# Altium PCB isokey_left.PcbDoc (part 3 of 5)
Units mm, origin at the board's own origin, x right, y up, seen from the top; angles counter-clockwise.
Board outline 154.06 x 134.15 mm, 2 copper layers (Top Layer, Bottom Layer), stack 1.569 mm thick; 140 components, 88 nets, 412 pads, 257 vias.
Unrouted connection lines stored in the file: 18.
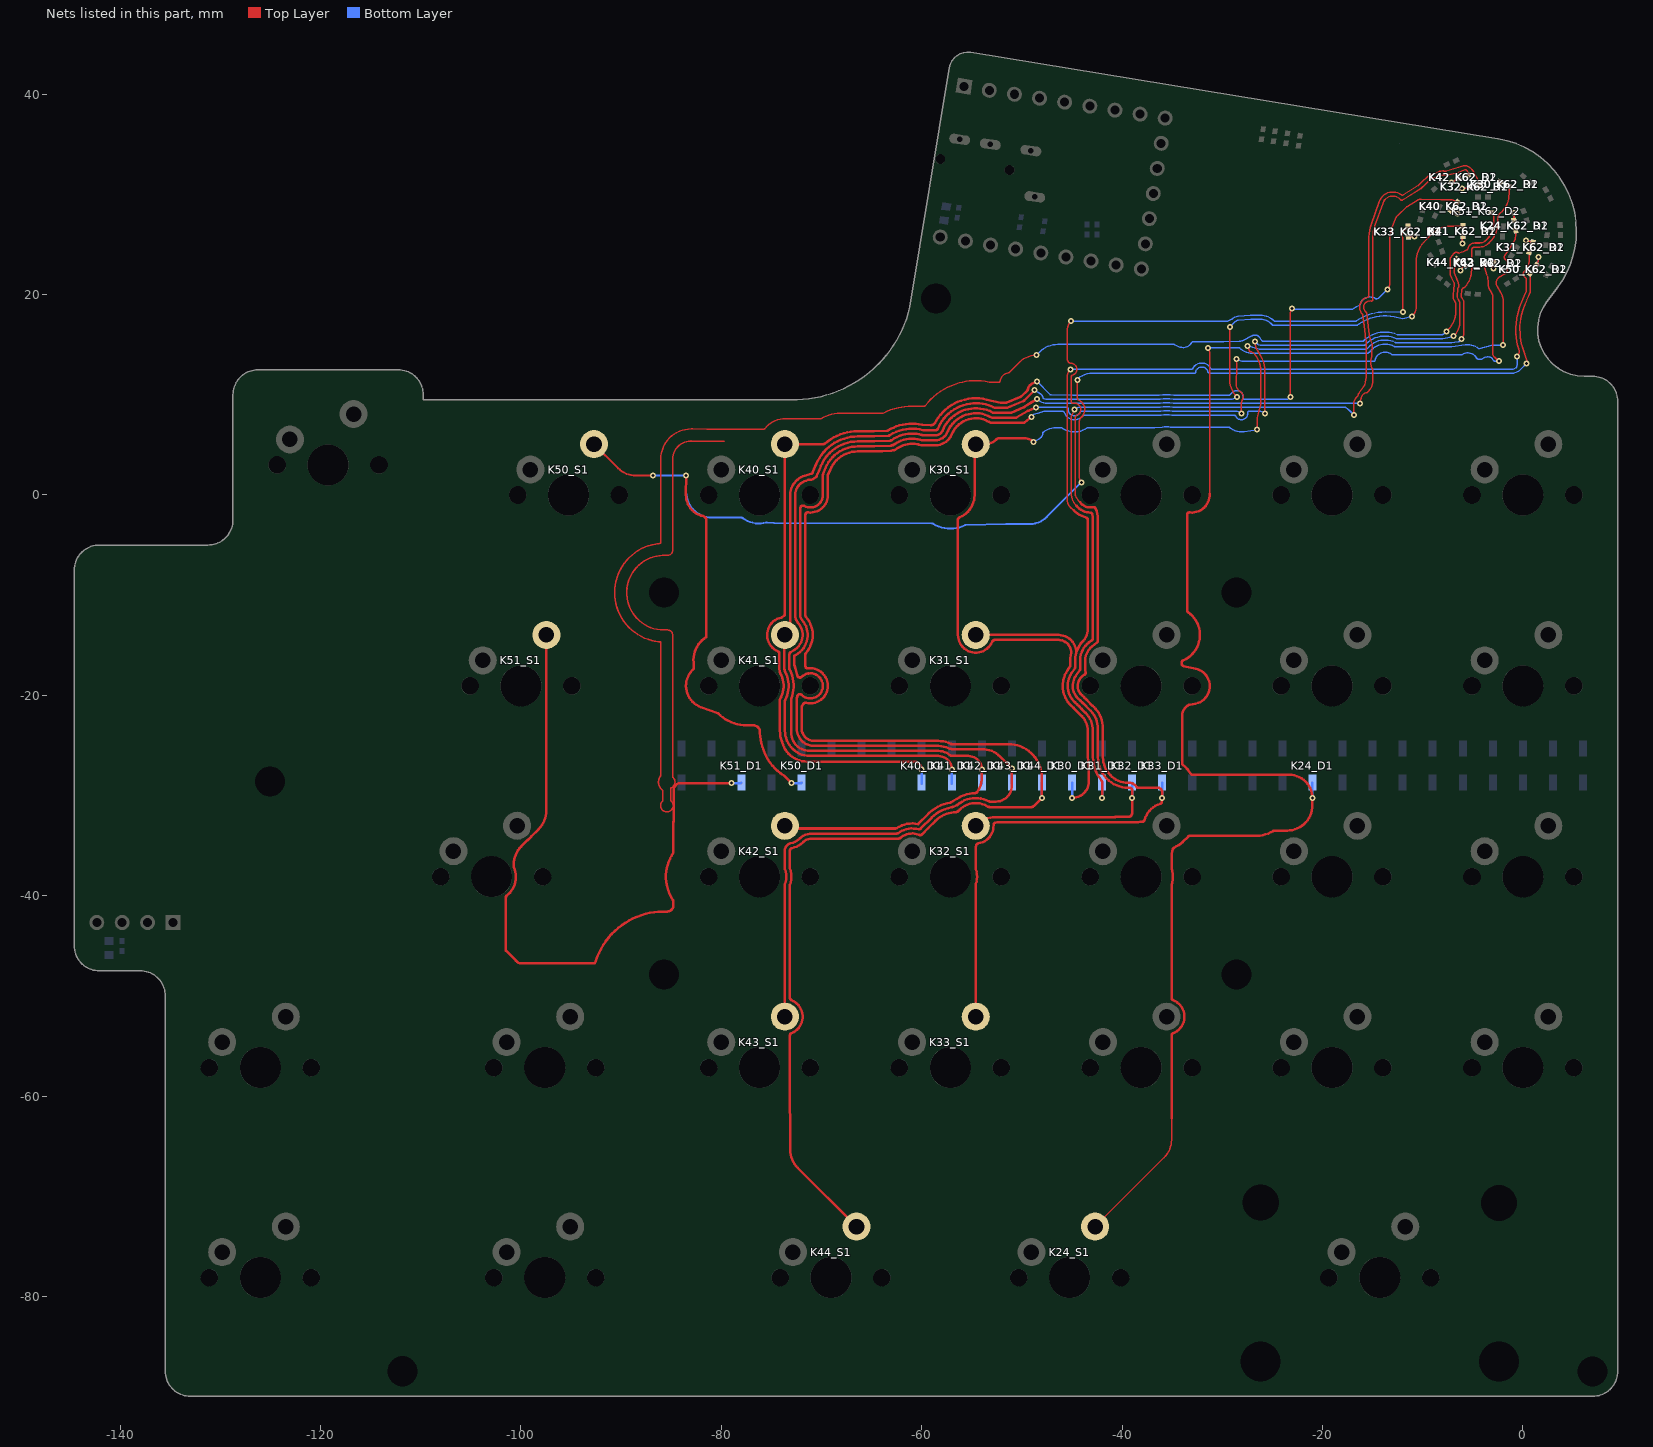
[diagram p3: the nets of this part, all layers, seen from the top]

## Via types
v1: diameter 0.6, hole 0.3, Top Layer to Bottom Layer, 257 vias

## Nets (pads, with @x,y where several pads share a name; then routed paths per layer and width w, separated by ;. In a path a pad name is that pad's centre, name@x,y a point inside that pad or via, vN(x,y) a via of type N, cw(c..) or ccw(c..) an arc to the next point about the centre after c; other vN are vias at no path point) (continued)
NetK24_D1_2: K24_D1.2 K24_K62_D2.2 K24_S1.2 | length 169.7
  Top Layer w0.15: K24_S1.2@-42.698,-73.026 -35.81,-66.138 ccw(c-37.606,-64.342) -35.066,-64.342 -35.066,-57.441 ; v1(-31.435,14.676) cw(c-31.823,14.288) -31.275,14.288 -31.275,0.128 ; -2.57,20.801 cw(c-2.916,20.6) -2.569,20.798 -2.222,20.198 -2.054,19.908 cw(c-2.184,19.833) -2.039,19.871 cw(c-4.001,19.366) -1.975,19.366 v1(-1.975,14.948) ; -2.57,20.801 cw(c-1.942,21.162) -2.667,21.156 cw(c-1.942,21.162) -2.625,21.404 cw(c-1.942,21.162) -2.306,21.789 -1.65,22.171 ccw(c-1.726,22.301) -1.648,22.173 ; -1.647,22.173 -1.592,22.207 ccw(c-1.633,22.247) -1.576,22.247 -1.576,23.296 ccw(c-1.726,23.296) -1.643,23.421 -1.713,23.467 cw(c-1.535,23.739) -1.806,23.918 -1.475,24.418 cw(c-1.204,24.239) -1.473,24.422 ; -1.472,24.423 -0.924,25.253 -0.797,25.444 ccw(c-0.923,25.527) -0.777,25.492 ccw(c-3.251,26.064) -0.711,26.064 K24_K62_D2.2@-0.711,26.397
  Top Layer w0.25: -35.066,-62.227 -35.066,-57.441 -35.066,-53.952 cw(c-34.816,-53.953) -34.909,-53.721 ccw(c-35.56,-52.07) -34.904,-50.421 cw(c-34.81,-50.189) -35.06,-50.19 -35.06,-43 -35.06,-38.995 cw(c-34.81,-38.996) -35.05,-38.926 ccw(c-37.856,-38.1) -35.05,-37.274 cw(c-34.81,-37.204) -35.06,-37.205 -35.06,-36.04 cw(c-33.02,-36.04) -34.929,-35.32 cw(c-34.695,-35.41) -34.806,-35.186 -34.602,-35.084 ccw(c-34.822,-34.635) -34.599,-35.082 ccw(c-35.56,-33.02) -33.97,-34.647 -33.392,-34.082 cw(c-33.217,-34.261) -33.256,-34.014 -33.25,-34.013 ccw(c-33.301,-33.516) -33.247,-34.013 ccw(c-33.301,-33.516) -33.245,-34.012 cw(c-33.02,-36.04) -33.02,-34 -26.54,-34 ccw(c-26.54,-30.96) -24.928,-33.537 cw(c-24.796,-33.75) -24.798,-33.5 -23.54,-33.5 ccw(c-23.54,-30.96) -21,-30.96 v1(-21,-30.25) ccw(c-23.326,-30.25) -23.326,-27.924 -32.956,-27.924 cw(c-32.956,-27.674) -33.169,-27.804 ccw(c-35.978,-29.506) -33.908,-26.956 cw(c-33.75,-26.763) -34,-26.763 -34,-21.986 -34,-21.985 cw(c-32.884,-21.985) -33.327,-20.96 cw(c-33.228,-21.19) -33.245,-20.941 ccw(c-33.419,-18.124) -32.41,-20.759 ccw(c-33.051,-19.086) -31.395,-18.4 -31.398,-18.393 ccw(c-33.02,-19.05) -32.646,-17.34 ; -33.91,-16.516 ccw(c-33.81,-16.745) -34.06,-16.745 -34.06,-16.831 ccw(c-33.81,-16.83) -33.863,-17.074 -32.647,-17.34 ; -33.91,-16.516 ccw(c-35.014,-13.97) -33.41,-11.706 cw(c-33.264,-11.503) -33.514,-11.504 -33.514,-1.984 cw(c-33.264,-1.985) -33.234,-1.737 ccw(c-33.02,0) -31.275,0.128
  Bottom Layer w0.15: v1(-31.435,14.676) -28.28,14.676 ccw(c-26.992,15.964) -26.992,14.142 -15.534,14.142 ccw(c-15.535,14.292) -15.453,14.167 ccw(c-16.859,16.282) -15.227,14.336 ccw(c-15.324,14.45) -15.206,14.358 cw(c-13.76,13.244) -14.817,14.732 cw(c-13.76,13.244) -12.849,14.825 ccw(c-12.774,14.956) -12.775,14.806 -7.12,14.806 ccw(c-7.12,14.956) -7.101,14.807 -5.738,14.977 cw(c-5.506,13.167) -4.387,14.609 -3.091,14.944 cw(c-3.053,14.798) -3.053,14.948 v1(-1.975,14.948)
  Bottom Layer w0.25: v1(-21,-30.25) K24_D1.2@-21,-28.7
NetK24_K62_D2_1: K24_K62_D2.1 K24_K62_R1.2 | length 1.5
  Top Layer w0.2: K24_K62_D2.1@-0.885,27.382 -0.889,27.387 -0.889,28.147 v1(-0.885,28.151)
  Bottom Layer w0.2: K24_K62_R1.2@-0.885,27.382 -0.889,27.387 -0.889,28.147 v1(-0.885,28.151)
NetK30_D1_2: K30_D1.2 K30_K62_D2.2 K30_S1.2 | length 129
  Top Layer w0.15: v1(-27.494,14.878) -27.325,14.41 ccw(c-27.184,14.461) -27.222,14.316 -27.125,14.291 cw(c-27.163,14.146) -27.099,14.281 ; -27.098,14.281 -26.933,14.201 cw(c-26.998,14.066) -26.895,14.174 -26.893,14.173 cw(c-28.69,12.378) -26.15,12.378 -26.15,9.037 cw(c-26.3,9.038) -26.156,8.997 -26.352,8.299 ccw(c-25.75,8.13) -26.352,8.297 -26.512,7.72 ccw(c-26.368,7.68) -26.518,7.68 v1(-26.518,6.526) ; v1(-6.131,15.558) ccw(c-6.674,16.101) -5.906,16.101 -5.906,19.327 ccw(c-6.056,19.327) -5.925,19.401 -6.112,19.73 cw(c-5.829,19.89) -6.152,19.921 -6.104,20.419 cw(c-5.78,20.388) -6.001,20.627 cw(c-5.78,20.388) -5.854,20.704 ccw(c-5.89,20.85) -5.779,20.749 ccw(c-7.664,22.451) -5.129,22.293 -5.121,22.422 cw(c-4.821,22.404) -5.118,22.45 -5.052,22.867 ccw(c-5.373,22.917) -5.049,22.942 -5.123,23.901 cw(c-4.799,23.926) -5.124,23.923 -5.124,24.426 cw(c-4.799,24.426) -4.799,24.751 -4.327,24.751 ccw(c-4.327,26.041) -3.414,25.128 -3.275,25.268 ccw(c-5.071,27.064) -2.54,26.849 -2.533,26.969 ccw(c-5.071,27.064) -2.531,27.064 -2.531,27.107 ; -2.531,27.11 -2.503,27.681 cw(c-1.879,27.65) -2.432,27.941 cw(c-1.879,27.65) -2.256,28.149 -2.135,28.24 ccw(c-2.226,28.359) -2.119,28.254 ccw(c-3.915,30.05) -1.375,30.05 K30_K62_D2.2@-1.375,30.817
  Top Layer w0.25: v1(-48.848,5.293) ccw(c-49.78,4.361) -49.78,5.679 -52.185,5.679 ccw(c-52.185,5.095) -52.598,5.508 cw(c-53.631,6.541) -53.631,5.08 K30_S1.2@-54.61,5.08 ccw(c-54.61,4.965) -54.725,4.965 -54.725,0 cw(c-57.15,0) -56.231,-2.244 ccw(c-56.135,-2.475) -56.385,-2.474 -56.385,-13.97 ccw(c-54.61,-13.97) -52.961,-14.627 cw(c-52.729,-14.72) -52.729,-14.47 -46.341,-14.47 cw(c-46.341,-15.736) -45.652,-14.674 cw(c-46.341,-15.736) -45.079,-15.63 cw(c-45.328,-15.65) -45.086,-15.71 ccw(c-41.91,-16.51) -45.183,-16.612 -45.171,-16.995 ; -45.171,-16.995 -45.169,-17.075 -45.32,-17.301 -45.47,-17.527 ccw(c-43.18,-19.05) -45.791,-18.186 ccw(c-43.18,-19.05) -45.865,-18.454 ccw(c-43.18,-19.05) -45.918,-18.791 ccw(c-43.18,-19.05) -45.809,-19.857 ccw(c-43.18,-19.05) -45.656,-20.246 ccw(c-43.18,-19.05) -45.247,-20.863 ccw(c-43.18,-19.05) -45.213,-20.902 ccw(c-43.18,-19.05) -45.042,-21.074 -45.023,-21.091 -44.868,-21.234 cw(c-45.376,-21.786) -44.847,-21.254 ; v1(-45,-30.25) ccw(c-45,-28.565) -43.315,-28.565 -43.315,-27.081 ccw(c-43.565,-27.081) -43.321,-27.028 cw(c-39.37,-26.182) -43.41,-26.182 -43.41,-23.536 ccw(c-45.45,-23.536) -43.996,-22.105 ccw(c-44.174,-22.281) -43.998,-22.103 -44.737,-21.364 -44.846,-21.255 ; -44.846,-21.255 ccw(c-45.2,-21.608) -44.847,-21.254
  Bottom Layer w0.15: v1(-48.848,5.293) -48.25,5.625 ccw(c-48.553,6.172) -47.929,6.149 cw(c-47.779,6.142) -47.871,6.26 cw(c-46.566,4.567) -46.566,6.705 -46.029,6.705 ccw(c-44.75,8.53) -43.507,6.68 cw(c-43.424,6.555) -43.425,6.705 -36.876,6.705 ccw(c-36.876,9.245) -36.731,6.709 -35.988,6.751 cw(c-35.56,5.08) -35.56,6.805 cw(c-35.56,5.08) -35.188,6.764 ; -35.186,6.764 ccw(c-35.1,7.157) -35.183,6.763 ccw(c-35.067,7.307) -35.067,6.751 -29.35,6.751 cw(c-29.351,6.601) -29.256,6.717 ccw(c-28.094,8.13) -27.911,6.31 ccw(c-28.094,8.13) -27.81,6.323 v1(-26.518,6.526) ; v1(-27.494,14.878) -26.321,14.556 ccw(c-26.215,14.942) -26.215,14.542 -15.665,14.542 ccw(c-15.665,14.692) -15.574,14.573 -15.559,14.586 -15.423,14.722 cw(c-13.76,13.244) -12.741,15.222 ccw(c-12.673,15.356) -12.674,15.206 -7.145,15.206 ccw(c-7.145,15.356) -7.126,15.207 -6.441,15.293 ccw(c-6.46,15.441) -6.354,15.335 v1(-6.131,15.558)
  Bottom Layer w0.25: v1(-45,-30.25) K30_D1.2@-45,-28.7
NetK30_K62_D2_1: K30_K62_D2.1 K30_K62_R1.2 | length 1.3
  Top Layer w0.15: v1(-2.597,30.71) cw(c-2.468,30.634) -2.574,30.74 -2.427,30.887 ccw(c-2.793,31.253) K30_K62_D2.1@-2.275,31.253
  Bottom Layer w0.15: v1(-2.597,30.71) -2.431,30.876 ccw(c-2.809,31.253) K30_K62_R1.2@-2.275,31.253
NetK31_D1_2: K31_D1.2 K31_K62_D2.2 K31_S1.2 | length 115.2
  Top Layer w0.15: -45.484,-0.449 ccw(c-44.401,-0.449) -45.167,-1.215 -44.869,-1.512 ccw(c-44.832,-1.475) -44.832,-1.527 ; -45.484,-0.448 -45.484,11.736 cw(c-44.344,11.736) v1(-45.15,12.542) ; -0.702,16.699 -0.687,16.014 ; -0.702,16.7 cw(c0.898,16.733) -0.702,16.703 cw(c1.473,16.745) -0.685,17.016 cw(c0.506,16.868) -0.685,17.017 ; -0.687,16.011 ccw(c1.487,16.06) -0.657,15.697 ccw(c0.132,15.829) -0.657,15.695 ; -0.685,17.018 cw(c-0.288,16.969) -0.685,17.019 -0.598,17.7 cw(c-0.201,17.649) -0.598,17.701 cw(c0.195,17.599) -0.598,17.703 cw(c1.559,17.425) -0.535,18.013 cw(c-0.149,17.907) -0.534,18.015 -0.349,18.674 cw(c0.421,18.458) -0.348,18.677 cw(c1.745,18.085) -0.257,18.934 0.148,19.89 0.323,20.303 ccw(c0.185,20.362) 0.335,20.362 0.335,21.562 ccw(c0.185,21.562) 0.275,21.682 0.159,21.77 cw(c0.354,22.029) 0.096,22.226 0.402,22.631 ccw(c0.283,22.722) 0.414,22.649 ccw(c-1.241,23.562) 0.649,23.562 K31_K62_D2.2@0.649,24.267 ; -0.657,15.694 -0.599,15.356 -0.542,15.019 ccw(c-0.147,15.086) -0.541,15.017 ; v1(-0.572,13.836) ccw(c-1.08,14.344) -0.362,14.344 -0.362,14.388 ; -0.541,15.015 ccw(c1.602,15.384) -0.467,14.714 ccw(c0.676,15.081) -0.466,14.711 -0.465,14.707 -0.364,14.393
  Top Layer w0.25: K31_S1.2@-54.61,-13.97 -46.341,-13.97 cw(c-46.341,-15.736) -44.575,-15.736 ; -44.832,-1.527 ccw(c-43.18,0) -44.042,-2.078 -43.565,-2.276 cw(c-43.661,-2.507) -43.411,-2.507 -43.411,-12.209 -43.411,-12.321 cw(c-43.911,-12.321) -43.411,-12.323 -43.411,-13.329 cw(c-43.911,-13.332) -43.411,-13.334 cw(c-45.269,-13.32) -43.411,-13.336 cw(c-45.269,-13.32) -43.888,-14.563 cw(c-44.26,-14.229) -43.903,-14.579 ccw(c-41.91,-16.51) -44.575,-15.736 ; -44.53,-20.865 cw(c-45.376,-21.786) -44.497,-20.897 cw(c-44.847,-21.254) -44.495,-20.899 cw(c-45.2,-21.608) -44.493,-20.901 -44.485,-20.909 -44.317,-21.077 -44.039,-21.354 ; -44.531,-20.864 -44.703,-20.706 cw(c-43.18,-19.05) -44.822,-20.588 cw(c-43.18,-19.05) -45.237,-19.963 cw(c-43.18,-19.05) -45.309,-19.778 cw(c-43.18,-19.05) -45.41,-18.75 cw(c-43.18,-19.05) -45.319,-18.351 cw(c-43.18,-19.05) -45.223,-18.107 cw(c-43.18,-19.05) -45.054,-17.804 -44.709,-17.285 ccw(c-44.917,-17.147) -44.667,-17.14 -44.681,-16.661 ccw(c-44.931,-16.668) -44.681,-16.656 cw(c-41.91,-16.51) -44.575,-15.736 ; -44.036,-21.358 -43.654,-21.74 cw(c-45.45,-23.536) -42.91,-23.536 -42.91,-26.182 ccw(c-39.37,-26.182) -42.575,-27.684 ccw(c-39.37,-26.182) -42.06,-28.483 cw(c-42.25,-28.646) -42,-28.646 v1(-42,-30.25)
  Bottom Layer w0.15: v1(-45.15,12.542) -33.081,12.542 ccw(c-33.082,12.692) -32.95,12.622 cw(c-32.044,12.142) -31.138,12.621 ccw(c-31.006,12.692) -31.006,12.542 -29.583,12.542 -28.789,12.542 cw(c-28.789,12.392) -28.764,12.54 ccw(c-28.593,13.551) -28.422,12.54 cw(c-28.397,12.392) -28.397,12.542 -8.587,12.542 -1.452,12.542 -1.052,12.542 ccw(c-1.052,12.692) -0.993,12.554 -0.707,12.676 ccw(c-0.767,12.814) -0.62,12.784 ccw(c-3.112,13.274) -0.572,13.274 v1(-0.572,13.836)
  Bottom Layer w0.25: v1(-42,-30.25) K31_D1.2@-42,-28.7
NetK31_K62_D2_1: K31_K62_D2.1 K31_K62_R1.2 | length 1.4
  Top Layer w0.15: v1(0.332,25.398) 0.419,25.312 0.867,25.312 K31_K62_D2.1@0.962,25.217
  Bottom Layer w0.15: v1(0.332,25.398) 0.419,25.312 0.867,25.312 K31_K62_R1.2@0.962,25.217
NetK32_D1_2: K32_D1.2 K32_K62_D2.2 K32_S1.2 | length 125.8
  Top Layer w0.15: v1(-44.75,8.53) -45.07,7.852 ccw(c-44.934,7.788) -45.084,7.788 -45.084,0.196 ccw(c-43.272,0.196) -44.553,-1.085 ; v1(-16.874,8) -16.874,8.95 ccw(c-17.024,8.95) -16.874,8.958 -16.883,9.122 cw(c-16.259,9.155) -16.788,9.488 -16.669,9.677 cw(c-16.542,9.597) -16.636,9.714 ccw(c-17.028,10.201) -16.42,10.058 ; -16.419,10.059 -16.394,10.108 cw(c-15.904,9.858) -16.355,10.174 -15.798,10.972 ccw(c-15.921,11.058) -15.779,11.008 ccw(c-17.871,11.742) -15.654,11.742 -15.654,13.342 -15.654,15.446 ccw(c-16.204,15.447) -15.671,15.581 ccw(c-16.059,15.484) -15.671,15.583 ; -15.804,16.477 -15.74,15.948 ccw(c-12.943,16.285) -15.671,15.584 ; -15.805,16.481 -15.985,17.967 ccw(c-16.134,17.948) -16.023,18.049 cw(c-15.268,18.742) -15.489,19.743 ccw(c-15.522,19.889) -15.372,19.889 -15.371,20.492 ; -15.371,20.493 cw(c-15.221,20.492) -15.37,20.512 ccw(c-16.263,20.638) -15.361,20.638 -15.361,25.27 -15.361,25.517 ; -15.361,25.52 -15.36,25.765 ; -15.36,25.766 cw(c-11.62,25.758) -15.145,27.009 ; -15.144,27.01 -14.333,29.295 ; -14.332,29.297 cw(c-12.99,28.818) -12.13,29.954 ccw(c-12.041,30.074) -11.963,29.946 -10.445,30.885 -10.008,31.307 ; -10.008,31.307 -9.578,31.722 cw(c-8.795,30.914) -9.186,31.969 -8.331,32.287 cw(c-8.076,31.609) -8.21,32.321 -8.01,32.359 cw(c-7.982,32.212) -7.912,32.345 ccw(c-7.761,32.632) -7.63,32.335 -5.918,32.855 cw(c-5.8,32.473) -5.8,32.873 cw(c-5.8,32.168) -5.338,32.7 -5.088,32.485 cw(c-5.299,32.237) -5.016,32.396 -4.331,31.172 cw(c-4.462,31.099) -4.315,31.128 cw(c-5.779,30.844) -4.298,31.02 K32_K62_D2.2@-4.288,30.844
  Top Layer w0.25: K32_S1.2@-54.61,-33.02 -54.477,-32.887 cw(c-52.681,-34.683) -52.681,-32.143 -40.701,-32.143 cw(c-40.673,-32.143) -40.673,-32.115 -39.37,-32.115 ccw(c-39.37,-31.745) -39,-31.745 v1(-39,-30.25) -39,-29.472 ccw(c-39.25,-29.472) -39.25,-29.222 -39.37,-29.222 cw(c-39.37,-26.182) -42.075,-27.569 cw(c-39.37,-26.182) -42.41,-26.182 -42.41,-23.329 ccw(c-44.95,-23.329) -42.601,-22.362 ccw(c-42.832,-22.457) -42.605,-22.353 -42.686,-22.177 ccw(c-44.95,-23.329) -43.154,-21.533 -43.906,-20.78 -43.965,-20.722 -44.138,-20.549 ccw(c-45.2,-21.608) -44.141,-20.545 ccw(c-44.495,-20.899) -44.143,-20.544 ; -44.553,-1.085 ccw(c-43.18,0) -43.544,-1.712 ccw(c-43.18,0) -43.205,-1.75 cw(c-43.21,-2) -42.967,-1.94 cw(c-44.95,-2.42) -42.91,-2.416 -42.91,-14.28 cw(c-43.16,-14.28) -43.005,-14.477 -43.315,-14.72 ccw(c-41.91,-16.51) -44.182,-16.634 -44.181,-16.64 cw(c-44.681,-16.66) -44.181,-16.643 -44.162,-17.284 cw(c-44.412,-17.291) -44.204,-17.429 -44.637,-18.08 ccw(c-43.18,-19.05) -44.643,-18.09 ccw(c-43.18,-19.05) -44.758,-18.294 ccw(c-43.18,-19.05) -44.9,-18.729 ccw(c-43.18,-19.05) -44.809,-19.689 ccw(c-43.18,-19.05) -44.808,-19.693 ccw(c-43.18,-19.05) -44.407,-20.298 ccw(c-43.18,-19.05) -44.365,-20.338 -44.191,-20.498 cw(c-45.376,-21.786) -44.147,-20.54 cw(c-44.497,-20.897) -44.144,-20.542 cw(c-44.847,-21.254) -44.143,-20.544
  Bottom Layer w0.15: v1(-44.75,8.53) cw(c-44.207,7.987) -44.207,8.755 -36.204,8.755 ccw(c-36.204,8.905) -36.179,8.757 cw(c-35.56,5.08) -34.941,8.757 ccw(c-34.916,8.905) -34.916,8.755 -17.757,8.755 cw(c-17.757,8.605) -17.675,8.731 cw(c-19.081,6.615) -17.285,8.411 v1(-16.874,8)
  Bottom Layer w0.25: v1(-39,-30.25) K32_D1.2@-39,-28.7
NetK32_K62_D2_1: K32_K62_D2.1 K32_K62_R1.2 | length 1.7
  Top Layer w0.15: v1(-6.081,30.595) -6.048,30.628 -5.315,30.628 K32_K62_D2.1@-5.273,30.67
  Bottom Layer w0.15: v1(-6.081,30.595) -6.048,30.628 -5.315,30.628 K32_K62_R1.2@-5.273,30.67
NetK33_D1_2: K33_D1.2 K33_K62_D2.2 K33_S1.2 | length 138.9
  Top Layer w0.15: v1(-45.1,17.342) ccw(c-44.173,16.415) -45.484,16.415 -45.484,13.558 ccw(c-45.334,13.559) -45.465,13.487 -45.332,13.244 ccw(c-45.201,13.316) -45.192,13.166 cw(c-45.15,12.542) -44.973,11.943 ccw(c-44.931,11.799) -45.08,11.816 ccw(c-44.344,11.736) -45.084,11.736 -45.084,10.291 -45.084,9.282 ccw(c-44.934,9.283) -44.899,9.137 cw(c-44.75,8.53) -44.537,7.943 ccw(c-44.485,7.802) -44.62,7.867 -44.67,7.762 ccw(c-44.534,7.698) -44.684,7.698 -44.684,0.196 ccw(c-43.272,0.196) -44.664,-0.039 ccw(c-44.516,-0.013) -44.653,-0.075 ccw(c-42.553,0.903) -44.191,-0.735 ; v1(-11.986,18.253) cw(c-11.926,18.313) -12.011,18.313 -12.011,25.464 ccw(c-12.161,25.464) -12.011,25.466 -12.02,26.079 cw(c-11.695,26.084) -11.908,26.33 -11.632,26.568 K33_K62_D2.2@-11.462,26.79
  Top Layer w0.25: K33_S1.2@-54.61,-52.07 -54.61,-38.919 cw(c-54.36,-38.921) -54.598,-38.845 ccw(c-56.906,-38.1) -54.598,-37.355 cw(c-54.36,-37.279) -54.61,-37.281 -54.61,-35.186 cw(c-53.975,-35.186) -54.551,-34.919 cw(c-54.325,-35.025) -54.361,-34.777 ccw(c-54.61,-33.02) -53.712,-34.551 ccw(c-54.61,-33.02) -52.836,-32.95 cw(c-52.587,-32.942) -52.653,-32.701 cw(c-52.221,-34.288) -52.221,-32.643 -38.393,-32.643 ccw(c-38.393,-30.25) -37.948,-32.602 ccw(c-37.996,-32.356) -37.755,-32.423 cw(c-35.56,-33.02) -36.206,-30.839 ccw(c-36.279,-30.599) -36.032,-30.641 ccw(c-38.393,-30.25) -36,-30.25 -36,-29.647 ccw(c-36.424,-29.647) -36.424,-29.222 -38.385,-29.222 cw(c-38.384,-28.972) -38.6,-29.098 ccw(c-39.25,-29.472) -39.25,-28.722 -39.37,-28.722 cw(c-39.37,-26.182) -41.034,-28.101 -41.172,-27.963 cw(c-39.392,-26.182) -41.91,-26.182 -41.91,-23.329 ccw(c-44.95,-23.329) -42.138,-22.173 ccw(c-42.832,-22.457) -42.139,-22.171 ccw(c-44.95,-23.329) -42.139,-22.17 ccw(c-42.601,-22.362) -42.14,-22.169 ccw(c-42.832,-22.457) -42.152,-22.142 -42.231,-21.97 ccw(c-42.686,-22.177) -42.24,-21.951 ccw(c-44.95,-23.329) -42.802,-21.178 -42.933,-21.047 ; -44.191,-0.735 ccw(c-43.18,0) -42.919,-1.222 cw(c-42.868,-1.467) -42.641,-1.362 cw(c-44.95,-2.42) -42.41,-2.42 -42.41,-14.523 cw(c-42.66,-14.523) -42.505,-14.719 -43.005,-15.113 ccw(c-41.91,-16.51) -43.685,-16.51 ccw(c-41.91,-16.51) -43.682,-16.609 cw(c-44.182,-16.635) -43.682,-16.612 cw(c-44.431,-16.647) -43.682,-16.625 -43.655,-17.507 -43.649,-17.733 cw(c-43.899,-17.733) -43.778,-17.952 ccw(c-43.18,-19.05) -44.049,-18.151 ccw(c-43.18,-19.05) -44.178,-18.297 ccw(c-43.18,-19.05) -44.389,-18.731 ccw(c-43.18,-19.05) -44.368,-19.44 ccw(c-43.18,-19.05) -44.026,-19.97 -43.993,-20 -43.852,-20.13 cw(c-45.376,-21.786) -43.796,-20.183 cw(c-44.147,-20.54) -43.794,-20.186 cw(c-44.497,-20.897) -43.791,-20.189 ; -43.79,-20.189 cw(c-44.143,-20.544) -43.788,-20.191 cw(c-44.141,-20.545) -43.787,-20.192 cw(c-45.2,-21.608) -43.785,-20.195 -43.611,-20.368 ; -43.611,-20.368 -43.553,-20.427 -43.481,-20.499 -42.936,-21.043
  Bottom Layer w0.15: v1(-45.1,17.342) -29.524,17.342 ccw(c-29.524,17.492) -29.462,17.356 -29.095,17.525 ccw(c-29.158,17.661) -29.054,17.553 cw(c-28.34,16.818) -28.431,17.839 -27.184,17.95 cw(c-26.957,15.417) -26.957,17.96 -26.251,17.96 cw(c-26.251,15.96) -24.847,17.385 ccw(c-24.743,17.492) -24.743,17.342 -16.715,17.342 ccw(c-16.715,17.492) -16.63,17.369 cw(c-13.76,13.244) -15.908,17.787 cw(c-13.76,13.244) -15.137,18.077 ; -15.135,18.077 cw(c-13.76,13.244) -13.708,18.269 v1(-11.986,18.253)
  Bottom Layer w0.25: v1(-36,-30.25) K33_D1.2@-36,-28.7
NetK33_K62_D2_1: K33_K62_D2.1 K33_K62_R1.2 | length 1.2
  Top Layer w0.15: K33_K62_D2.1@-11.438,25.79 -10.885,25.79 cw(c-10.885,25.414) v1(-10.821,25.784)
  Bottom Layer w0.15: K33_K62_R1.2@-11.438,25.79 -11.263,25.774 v1(-10.821,25.784)
NetK40_D1_2: K40_D1.2 K40_K62_D2.2 K40_S1.2 | length 135.5
  Top Layer w0.15: v1(-23.21,9.78) -23.21,18.156 cw(c-22.664,18.156) -23.05,18.542 v1(-23.05,18.592) ; v1(-13.513,20.529) ccw(c-14.056,21.072) -13.288,21.072 -13.288,25.504 cw(c-10.348,25.504) -13.259,25.912 ; -13.259,25.913 -13.205,26.296 cw(c-12.809,26.24) -13.205,26.297 cw(c-11.695,26.084) -13.107,26.66 cw(c-12.736,26.51) -13.107,26.662 -12.858,27.269 -12.76,27.51 cw(c-11.719,27.084) -12.496,27.896 -11.605,28.749 cw(c-11.501,28.641) -11.58,28.768 -10.529,29.421 cw(c-10.146,28.805) -10.412,29.479 cw(c-10.146,28.805) -10.122,29.53 -8.186,29.468 ; -8.185,29.468 -7.201,29.468 cw(c-7.201,28.578) K40_K62_D2.2@-6.573,29.207
  Top Layer w0.25: -74.2,-17.377 ccw(c-73.2,-17.376) -74.148,-17.694 ccw(c-73.674,-17.536) -74.147,-17.696 -74.134,-17.735 ccw(c-73.661,-17.575) -74.133,-17.738 ccw(c-73.187,-17.415) -74.132,-17.741 ccw(c-73.659,-17.578) -74.13,-17.746 ccw(c-72.95,-17.334) -74.06,-17.909 ccw(c-73.615,-17.68) -74.058,-17.913 ; -74.2,-17.376 -74.2,-15.834 ccw(c-74.45,-15.834) -74.349,-15.606 -74.351,-15.605 cw(c-73.66,-13.97) -74.018,-12.232 -74.016,-12.231 ccw(c-74.068,-11.986) -73.922,-12.19 -73.764,-12.076 ccw(c-73.91,-11.873) -73.66,-11.873 K40_S1.2@-73.66,5.08 -69.799,5.08 ccw(c-69.8,5.33) -69.638,5.14 cw(c-66.38,1.36) -66.377,6.35 -65.776,6.35 -64.777,6.351 ccw(c-64.778,6.601) -64.767,6.351 -63.458,6.415 ccw(c-63.471,6.665) -63.342,6.45 cw(c-60.96,2.54) -62.23,6.939 cw(c-60.96,2.54) -59.963,7.009 -59.117,6.972 ccw(c-59.095,7.472) -58.93,7 ccw(c-59.095,7.472) -58.664,7.219 -58.56,7.396 cw(c-54.61,5.08) -53.516,9.526 -52.137,9.189 ; -74.16,-20.564 -74.16,-20.634 -74.16,-23.51 ccw(c-71.12,-23.51) -73.929,-24.671 cw(c-74.161,-24.766) -73.919,-24.702 ; -74.16,-20.563 cw(c-73.41,-20.565) -74.071,-20.211 cw(c-73.63,-20.446) -74.07,-20.209 ccw(c-76.2,-19.05) -74.025,-20.123 ccw(c-76.2,-19.05) -74.025,-17.977 ccw(c-76.2,-19.05) -74.058,-17.914 ; -73.919,-24.703 ccw(c-71.46,-24.066) -71.46,-26.606 -60.783,-26.606 cw(c-60.783,-27.389) v1(-60,-27.389) ; -52.135,9.189 -51.715,9.189 ccw(c-51.715,11.729) -51.653,9.189 ccw(c-51.66,9.439) -51.565,9.208 -50.129,9.803 ccw(c-50.226,10.033) -50.05,9.856 -49.458,10.448 ccw(c-49.636,10.623) -49.389,10.583 cw(c-48.723,10.476) -49.028,11.078 v1@-48.51,11.342
  Bottom Layer w0.15: v1(-48.509,11.342) -47.194,10.027 ; -47.193,10.027 ccw(c-47.088,10.133) -47.09,9.983 -44.934,9.955 -36.298,9.955 ccw(c-36.298,10.105) -36.276,9.957 cw(c-35.56,5.08) -34.843,9.957 ccw(c-34.822,10.105) -34.822,9.955 -29.351,9.955 ccw(c-29.351,10.105) -29.246,9.998 -28.985,10.251 cw(c-28.55,9.803) -27.93,9.723 ccw(c-27.781,9.705) -27.782,9.555 -23.554,9.555 ccw(c-23.555,9.705) -23.482,9.574 ccw(c-24.094,10.664) v1(-23.21,9.78) ; v1@-23.05,18.542 -17.028,18.542 cw(c-13.76,13.244) -16.341,18.909 ; -16.34,18.909 ccw(c-16.403,19.045) -16.259,19.006 cw(c-15.268,18.742) -14.688,19.587 ccw(c-14.604,19.711) -14.548,19.572 -14.447,19.612 ccw(c-14.503,19.751) -14.397,19.645 v1(-13.513,20.529)
  Bottom Layer w0.25: K40_D1.2@-60,-28.8 v1(-60,-27.389)
NetK40_K62_D2_1: K40_K62_D2.1 K40_K62_R1.2 | length 1.7
  Top Layer w0.15: K40_K62_D2.1@-7.206,28.433 -7.198,28.441 -6.91,28.441 -6.548,28.079 v1(-6.511,28.079)
  Bottom Layer w0.15: K40_K62_R1.2@-7.206,28.433 -7.198,28.441 -6.91,28.441 -6.548,28.079 v1(-6.511,28.079)
NetK41_D1_2: K41_D1.2 K41_K62_D2.2 K41_S1.2 | length 132
  Top Layer w0.15: v1(-29.252,16.767) -29.25,16.167 ; -29.25,16.167 -29.25,11.494 ccw(c-26.858,11.494) v1(-28.55,9.803) ; v1(-11.053,17.831) ccw(c-12.027,18.805) -10.649,18.805 -10.649,23.316 cw(c-7.877,23.316) -9.91,25.2 -9.33,25.826 -9.074,26.082 cw(c-7.278,24.286) -7.278,26.826 K41_K62_D2.2@-5.999,26.826
  Top Layer w0.25: K41_S1.2@-73.66,-13.97 -73.699,-15.851 cw(c-74.449,-15.835) -73.699,-15.859 -73.7,-15.874 ccw(c-72.95,-15.897) -73.7,-15.897 -73.7,-17.376 ccw(c-73.2,-17.376) -73.674,-17.536 -73.661,-17.575 ccw(c-73.187,-17.415) -73.659,-17.578 ccw(c-72.95,-17.334) -73.615,-17.68 ccw(c-73.171,-17.451) -73.614,-17.682 cw(c-76.2,-19.05) -73.525,-17.867 cw(c-76.2,-19.05) -73.525,-20.233 cw(c-76.2,-19.05) -73.63,-20.446 ccw(c-73.41,-20.565) -73.66,-20.565 -73.66,-23.51 ccw(c-71.12,-23.51) -72.652,-25.535 cw(c-72.803,-25.735) -72.648,-25.539 ccw(c-71.185,-23.686) -71.449,-26.032 ; K41_S1.2@-73.114,-13.97 -73.114,-0.73 -73.114,0.006 cw(c-71.12,0.006) -72.396,1.538 cw(c-71.12,0.006) -71.669,1.923 -71.037,2.104 ccw(c-71.106,2.344) -70.862,2.288 ccw(c-71.85,2.513) -70.862,2.29 ccw(c-71.106,2.344) -70.861,2.291 -70.515,3.109 cw(c-66.38,1.36) -66.378,5.85 -65.776,5.85 -64.764,5.851 ccw(c-64.766,6.101) -64.754,5.851 -63.302,5.922 ccw(c-63.316,6.172) -63.181,5.961 cw(c-60.96,2.54) -61.899,6.51 cw(c-60.96,2.54) -59.873,6.472 -58.615,6.472 ccw(c-58.616,6.722) -58.385,6.626 cw(c-54.61,5.08) -57.789,7.636 cw(c-54.61,5.08) -55.165,9.121 cw(c-54.61,5.08) -53.046,8.847 cw(c-53.792,7.045) -53.041,8.845 ; -71.448,-26.032 ccw(c-71.161,-23.686) -71.161,-26.05 -58.34,-26.05 cw(c-58.34,-27.389) v1(-57,-27.389) ; -53.038,8.844 cw(c-54.61,5.08) -52.708,8.689 -51.562,8.689 ccw(c-51.562,8.939) -51.466,8.708 -49.847,9.379 ccw(c-49.943,9.61) -49.766,9.432 v1(-48.723,10.476)
  Bottom Layer w0.15: v1(-48.723,10.476) -48.171,10.119 cw(c-48.509,9.593) -47.897,9.722 ccw(c-47.751,9.754) -47.799,9.612 ccw(c-47.452,10.65) -47.452,9.555 -46.284,9.555 -36.268,9.555 ccw(c-36.269,9.705) -36.248,9.557 -36.213,9.562 cw(c-35.56,5.08) -34.908,9.562 -34.873,9.557 ccw(c-34.851,9.705) -34.852,9.555 -29.25,9.555 -29.148,9.555 ccw(c-29.148,10.402) v1(-28.55,9.803) ; v1(-29.252,16.767) -28.792,17.249 cw(c-28.34,16.818) -28.394,17.44 -27.149,17.552 cw(c-26.957,15.417) -26.957,17.56 -26.251,17.56 cw(c-26.251,15.96) -25.12,17.091 -25.014,16.986 ccw(c-24.908,17.092) -24.908,16.942 -16.586,16.942 ccw(c-16.587,17.092) -16.499,16.971 cw(c-13.76,13.244) -16.324,17.093 cw(c-13.76,13.244) -15.472,17.541 cw(c-13.76,13.244) -15.026,17.692 cw(c-13.76,13.244) -12.849,17.779 -11.986,17.606 v1(-11.053,17.831)
  Bottom Layer w0.25: K41_D1.2@-57,-28.8 v1(-57,-27.389)
NetK41_K62_D2_1: K41_K62_D2.1 K41_K62_R1.2 | length 1.4
  Top Layer w0.15: v1(-6.04,25.122) -6.04,25.601 K41_K62_D2.1@-5.999,25.826
  Bottom Layer w0.15: v1(-6.04,25.122) -6.04,25.601 K41_K62_R1.2@-5.999,25.826
NetK42_D1_2: K42_D1.2 K42_K62_D2.2 K42_S1.2 | length 162.2
  Top Layer w0.15: v1(-16.259,9.155) -16.136,9.684 cw(c-15.99,9.65) -16.123,9.72 ccw(c-17.028,10.201) -16.047,9.903 cw(c-15.904,9.858) -16.027,9.945 ; -16.026,9.946 cw(c-15.519,9.581) -15.598,10.201 ccw(c-15.618,10.349) -15.5,10.256 -15.397,10.389 cw(c-14.27,9.517) -15.27,10.533 ccw(c-15.376,10.639) -15.259,10.545 ccw(c-16.335,11.401) -15.016,11.014 ccw(c-17.509,11.497) -14.969,11.497 -14.969,12.449 ccw(c-15.119,12.449) -14.989,12.524 cw(c-13.76,13.244) -15.072,13.799 ccw(c-15.211,13.858) -15.061,13.855 -15.037,15.034 ccw(c-15.186,15.038) -15.055,15.11 cw(c-12.943,16.285) -15.343,15.997 ; -15.343,15.997 -15.606,18.156 ccw(c-15.755,18.138) -15.66,18.255 cw(c-15.268,18.742) -15.147,19.355 ccw(c-15.119,19.502) -14.969,19.501 -14.969,20.483 cw(c-14.819,20.483) -14.968,20.499 ccw(c-16.263,20.638) -14.961,20.638 -14.961,25.269 -14.96,25.764 cw(c-11.62,25.758) -14.768,26.875 ; -14.767,26.876 -13.956,29.161 cw(c-13.579,29.027) -13.955,29.162 cw(c-12.99,28.818) -13.663,29.59 cw(c-12.99,28.818) -12.204,29.476 ccw(c-12.09,29.574) -12.012,29.446 -11.928,29.498 cw(c-9.983,26.352) -11.926,29.499 -10.212,30.559 -10.198,30.568 -9.731,31.018 cw(c-9.227,30.497) -9.73,31.02 -9.3,31.435 cw(c-8.795,30.914) -9.048,31.594 -8.191,31.913 cw(c-8.076,31.609) -8.043,31.932 -7.835,31.911 ccw(c-7.761,32.632) -7.603,31.925 -6.525,32.165 ccw(c-6.558,32.312) -6.499,32.174 -5.8,32.473 cw(c-5.8,32.168) -5.496,32.168 K42_K62_D2.2@-5.496,31.9
  Top Layer w0.25: K42_S1.2@-73.66,-33.02 ccw(c-73.013,-32.373) -73.013,-33.288 -62.629,-33.288 ccw(c-62.631,-33.038) -62.493,-33.247 cw(c-60.96,-35.56) -60.37,-32.848 -59.348,-31.827 ; -72.614,-12.003 ccw(c-71.364,-12) -72.614,-12.005 ccw(c-71.364,-12) -72.324,-12.802 ccw(c-71.938,-12.484) -72.32,-12.806 ccw(c-71.935,-12.486) -72.316,-12.81 cw(c-73.66,-13.97) -72.615,-15.404 cw(c-73.66,-13.97) -72.777,-15.51 -73.075,-15.681 ccw(c-72.95,-15.897) -73.089,-15.689 ccw(c-72.95,-15.897) -73.2,-15.897 -73.2,-17.376 -73.187,-17.415 ccw(c-72.95,-17.334) -73.171,-17.451 cw(c-76.2,-19.05) -73.025,-17.765 cw(c-76.2,-19.05) -73.025,-20.335 cw(c-76.2,-19.05) -73.046,-20.385 -73.046,-23.686 ccw(c-71.185,-23.686) -71.391,-25.536 cw(c-71.419,-25.784) -71.389,-25.536 ccw(c-71.161,-23.686) -71.161,-25.55 -58.34,-25.55 cw(c-58.34,-27.389) -57.145,-25.991 ccw(c-56.983,-25.8) -56.983,-26.05 -55.34,-26.05 cw(c-55.34,-27.389) v1(-54,-27.389) -54,-28.185 cw(c-56.54,-28.185) -54.457,-29.639 cw(c-54.662,-29.495) -54.657,-29.745 ccw(c-54.61,-33.02) -56.294,-30.211 -56.446,-30.302 -57.05,-30.663 cw(c-57.177,-30.449) -57.136,-30.695 ccw(c-56.491,-34.683) -59.252,-31.734 ccw(c-56.491,-34.683) -59.347,-31.826 ; -72.614,-12.002 -72.614,-11.503 cw(c-72.114,-11.503) -72.614,-11.499 -72.614,-0.73 ccw(c-73.114,-0.73) -72.614,-0.728 ; -72.614,-0.727 -72.614,0.006 cw(c-71.12,0.006) -71.533,1.442 ccw(c-71.669,1.923) -71.531,1.442 -71.336,1.498 cw(c-71.268,1.258) -71.268,1.508 -71.037,1.508 ccw(c-71.669,3.233) -70.579,1.754 ccw(c-70.728,1.954) -70.498,1.856 -70.416,2.05 ccw(c-71.106,2.344) -70.413,2.056 -70.293,2.345 cw(c-69.37,1.96) -70.292,2.346 -70.062,2.898 ; -70.061,2.899 cw(c-66.38,1.36) -69.831,3.362 cw(c-66.38,1.36) -66.374,5.35 -65.775,5.35 -64.752,5.351 ccw(c-64.753,5.601) -64.74,5.351 -63.14,5.429 ccw(c-63.153,5.679) -63.008,5.475 cw(c-60.96,2.54) -61.899,5.994 cw(c-60.96,2.54) -60.225,6.043 cw(c-60.96,2.54) -60.007,5.99 ; -60.005,5.989 ccw(c-59.873,6.472) -59.872,5.972 -58.615,5.972 ccw(c-58.616,6.722) -57.924,6.432 ccw(c-58.385,6.626) -57.923,6.435 ; -57.922,6.438 cw(c-54.61,5.08) -57.819,6.665 cw(c-54.61,5.08) -57.234,7.514 cw(c-54.61,5.08) -53.237,8.385 cw(c-53.792,7.045) -53.233,8.384 ; -53.231,8.383 cw(c-54.61,5.08) -52.89,8.219 ccw(c-52.771,8.439) -52.772,8.189 -51.175,8.189 ccw(c-51.175,8.439) -51.075,8.209 -49.826,8.75 ccw(c-49.926,8.98) -49.79,8.769 -48.946,9.312 cw(c-48.579,8.746) -48.943,9.314 v1(-48.509,9.593)
  Bottom Layer w0.15: v1(-48.509,9.593) ccw(c-47.452,10.65) -47.452,9.155 -36.237,9.155 ccw(c-36.237,9.305) -36.213,9.157 cw(c-35.56,5.08) -34.907,9.157 ccw(c-34.883,9.305) -34.883,9.155 v1(-16.259,9.155)
  Bottom Layer w0.25: K42_D1.2@-54,-28.8 v1(-54,-27.389)
NetK42_K62_D2_1: K42_K62_D2.1 K42_K62_R1.2 | length 1.7
  Top Layer w0.2: v1(-7.12,31.176) -7.044,31.252 -6.883,31.252 -6.578,31.558 K42_K62_D2.1@-6.435,31.558
  Bottom Layer w0.15: v1(-7.12,31.176) -7.034,31.262 -6.888,31.262 -6.592,31.558 K42_K62_R1.2@-6.435,31.558
NetK43_D1_2: K43_D1.2 K43_K62_D2.2 K43_S1.2 | length 189.7
  Top Layer w0.15: -28.597,10.942 ccw(c-27.961,10.942) -28.411,10.492 -28.291,10.372 cw(c-28.55,9.803) -27.953,9.617 -28.087,9.187 ccw(c-27.944,9.143) -28.094,9.143 v1(-28.094,8.13) ; -28.597,10.945 -28.581,12.95 ; v1(-28.593,13.567) -28.581,12.966 -28.581,12.954 cw(c-28.731,12.951) -28.581,12.951 ; K43_K62_D2.2@-3.927,23.038 -3.873,22.87 -3.586,21.973 cw(c-6.251,21.116) -3.463,21.371 ; -3.462,21.278 ccw(c-1.942,21.162) -3.464,21.074 -3.464,21.072 ccw(c-1.942,21.162) -3.265,20.404 ccw(c-2.916,20.6) -3.262,20.4 -3.171,20.24 -3.039,20.008 cw(c-3.169,19.934) -3.019,19.934 -3.019,14.226 ccw(c-2.395,14.209) -2.811,13.743 v1(-2.382,13.359) ; -3.462,21.281 ccw(c-3.861,21.31) -3.462,21.284 ccw(c-4.011,21.321) -3.462,21.366 ccw(c-3.861,21.334) -3.463,21.369
  Top Layer w0.25: K43_S1.2@-73.66,-52.07 -73.66,-38.919 cw(c-73.41,-38.921) -73.648,-38.845 ccw(c-75.956,-38.1) -73.648,-37.355 cw(c-73.41,-37.279) -73.66,-37.281 -73.66,-35.493 cw(c-73.16,-35.493) -73.66,-35.49 cw(c-72.91,-35.494) -73.105,-34.77 -72.84,-34.698 ccw(c-72.905,-34.457) -72.823,-34.693 ccw(c-73.416,-33.02) -72.821,-34.692 ccw(c-73.416,-33.02) -72.166,-34.28 cw(c-71.812,-34.634) -72.16,-34.274 cw(c-70.962,-35.508) -70.962,-33.788 -62.471,-33.788 ccw(c-62.472,-33.538) -62.323,-33.739 cw(c-60.96,-35.56) -61.803,-33.447 cw(c-60.96,-35.56) -60.323,-33.376 ccw(c-60.295,-33.128) -60.119,-33.305 -58.994,-32.18 cw(c-56.491,-34.683) -57.055,-31.188 ccw(c-57.136,-30.695) -57.052,-31.188 ccw(c-57.177,-30.449) -56.88,-31.137 -56.505,-30.975 ccw(c-56.605,-30.746) -56.441,-30.934 cw(c-54.61,-33.02) -56.439,-30.933 cw(c-54.61,-33.02) -53.822,-30.359 cw(c-54.61,-33.02) -53.306,-30.57 ccw(c-53.189,-30.349) -53.189,-30.599 -52.595,-30.599 ccw(c-52.595,-29.005) -51,-29.005 -51,-28.972 ; -72.114,-12.004 ccw(c-71.364,-12) -71.941,-12.479 cw(c-72.324,-12.802) -71.938,-12.483 ccw(c-71.364,-12) -71.936,-12.486 cw(c-73.66,-13.97) -72.528,-15.943 -72.7,-16.042 -72.7,-17 ccw(c-72.45,-16.998) -72.678,-17.1 cw(c-74.991,-18.151) -72.564,-17.401 cw(c-72.803,-17.475) -72.559,-17.421 -72.472,-17.818 ccw(c-72.228,-17.765) -72.466,-17.841 cw(c-76.2,-19.05) -72.407,-18.04 ccw(c-72.166,-17.975) -71.992,-18.155 cw(c-71.12,-19.05) -71.992,-19.946 ccw(c-72.166,-20.125) -72.407,-20.06 cw(c-76.2,-19.05) -72.441,-20.178 ccw(c-72.201,-20.249) -72.451,-20.239 -72.491,-21.244 ccw(c-71.355,-21.29) -72.492,-21.29 -72.492,-23.258 ccw(c-70.7,-23.258) -72.168,-24.285 cw(c-72.373,-24.429) -72.154,-24.309 ccw(c-71.12,-23.75) -71.519,-24.855 -71.508,-24.859 cw(c-71.593,-25.094) -71.484,-24.869 ccw(c-70.7,-23.258) -71.004,-25.024 ccw(c-70.7,-23.258) -70.7,-25.05 -58.34,-25.05 cw(c-58.34,-27.389) -57.32,-25.284 ccw(c-56.992,-24.609) -57.318,-25.284 cw(c-58.34,-27.389) -57.316,-25.285 ccw(c-57.101,-24.834) -57.314,-25.287 ccw(c-56.992,-24.609) -56.992,-25.359 -53.982,-25.359 cw(c-53.982,-27.899) -52.186,-26.103 v1(-51,-27.289) -51,-28.967 ; -72.114,-12.003 -72.114,-11.5 -72.114,-1.301 cw(c-71.864,-1.302) -71.741,-1.085 ccw(c-71.12,0) -69.87,0 -69.87,1.96 cw(c-69.37,1.96) -69.831,2.153 -69.601,2.705 cw(c-66.38,1.36) -66.38,4.85 -65.775,4.85 -64.752,4.851 ccw(c-64.753,5.601) -64.717,4.852 -63.088,4.931 cw(c-63.064,4.432) -63.077,4.932 -63.05,4.933 ccw(c-63.058,5.182) -63.046,4.933 ccw(c-63.081,5.609) -62.904,4.955 ccw(c-62.971,5.196) -62.828,4.991 -62.722,5.065 cw(c-60.96,2.54) -62.073,5.411 cw(c-60.96,2.54) -60.71,5.609 cw(c-60.96,2.54) -60.141,5.508 ccw(c-59.873,6.472) -60.139,5.508 ; -60.137,5.507 ccw(c-60.005,5.989) -60.134,5.506 ccw(c-59.873,6.472) -59.871,5.472 -58.616,5.472 ; -58.614,5.472 ccw(c-58.616,6.722) -57.463,6.238 ccw(c-58.385,6.626) -57.461,6.242 ccw(c-57.923,6.435) -57.46,6.244 ; -57.46,6.246 ccw(c-58.385,6.626) -57.459,6.247 ; -57.459,6.249 cw(c-54.61,5.08) -57.376,6.432 cw(c-54.61,5.08) -56.105,7.772 cw(c-54.61,5.08) -53.429,7.923 cw(c-53.792,7.045) -53.425,7.922 cw(c-54.61,5.08) -52.974,7.689 -50.688,7.689 ccw(c-50.688,7.939) -50.564,7.721 -49.403,8.384 cw(c-49.068,7.798) -49.335,8.418 v1(-48.579,8.746)
  Bottom Layer w0.15: v1(-48.579,8.746) -45.521,8.746 cw(c-45.522,8.596) -45.373,8.584 ccw(c-44.75,8.53) -44.182,8.269 cw(c-44.046,8.205) -44.047,8.355 -42.868,8.355 -36.17,8.355 ccw(c-36.17,8.505) -36.144,8.357 cw(c-35.56,5.08) -34.976,8.357 ccw(c-34.95,8.505) -34.952,8.355 ; -34.95,8.355 -29,8.355 -28.637,8.355 cw(c-28.637,7.587) v1(-28.094,8.13) ; v1(-28.593,13.567) -28.061,13.353 ccw(c-28.005,13.492) -28.005,13.342 -14.78,13.342 cw(c-13.76,13.244) -13.112,14.039 ccw(c-13.019,14.156) -13.019,14.006 -6.096,14.006 cw(c-5.506,13.167) -4.6,13.646 ccw(c-4.468,13.717) -4.469,13.567 -4.124,13.567 ccw(c-4.186,13.704) -4.122,13.568 -3.763,13.734 ; -3.763,13.734 cw(c-3.499,13.167) -2.937,13.442 ccw(c-2.803,13.509) -2.804,13.359 v1(-2.382,13.359)
  Bottom Layer w0.25: K43_D1.2@-51,-28.7 v1(-51,-27.289)
NetK43_K62_D2_1: K43_K62_D2.1 K43_K62_R1.2 | length 1.2
  Top Layer w0.15: K43_K62_D2.1@-2.942,23.212 -2.921,23.191 v1(-2.921,22.613)
  Bottom Layer w0.15: K43_K62_R1.2@-2.942,23.212 -2.921,23.191 v1(-2.921,22.613)
NetK44_D1_2: K44_D1.2 K44_K62_D2.2 K44_S1.2 | length 212.2
  Top Layer w0.15: v1(-26.755,15.335) -26.68,14.789 ccw(c-26.531,14.81) -26.665,14.743 ccw(c-26.531,14.81) -26.661,14.735 -26.15,13.859 cw(c-28.69,12.378) -25.769,12.708 -25.75,12.543 v1(-25.75,8.13) ; v1(-6.925,15.862) ccw(c-6.934,16.012) -6.823,15.911 ccw(c-8.335,17.264) -6.306,17.264 -6.306,19.261 -6.46,19.533 ; K44_K62_D2.2@-6.484,23.238 -6.784,22.73 ccw(c-6.246,22.412) -6.856,22.551 -6.867,22.504 ccw(c-6.72,22.47) -6.87,22.47 -6.87,22.412 ccw(c-6.245,22.412) -6.829,22.188 -6.486,21.295 cw(c-7.162,21.035) -6.449,21.167 cw(c-6.842,21.093) -6.449,21.164 -6.407,20.933 cw(c-6.801,20.862) -6.401,20.862 cw(c-6.801,20.862) -6.437,20.694 ccw(c-5.78,20.388) -6.502,20.46 ccw(c-6.104,20.419) -6.502,20.458 -6.55,19.96 ccw(c-6.152,19.921) -6.551,19.958 ccw(c-5.829,19.89) -6.46,19.534
  Top Layer w0.25: -71.744,-24.019 cw(c-70.7,-23.258) -71.992,-23.258 -71.992,-21.29 cw(c-71.355,-21.29) -71.759,-20.797 cw(c-71.601,-20.991) -71.542,-20.748 ccw(c-71.12,-19.05) -71.335,-17.313 cw(c-71.364,-17.065) -71.364,-17.315 cw(c-71.364,-17.065) -71.614,-17.067 -71.614,-15.939 cw(c-71.364,-15.94) -71.555,-15.778 ccw(c-73.66,-13.97) -71.555,-12.162 cw(c-71.364,-12) -71.614,-12.001 -71.614,-1.984 cw(c-71.364,-1.985) -71.334,-1.737 ccw(c-71.12,0) -69.37,0 -69.37,1.96 -69.139,2.513 cw(c-66.38,1.36) -66.38,4.35 -63.945,4.35 ccw(c-63.946,4.6) -63.924,4.351 -63.064,4.432 ccw(c-63.081,5.609) -63.061,4.432 ccw(c-63.081,5.609) -62.622,4.525 -62.438,4.653 cw(c-60.96,2.54) -62.255,4.77 cw(c-60.96,2.54) -61.407,5.08 cw(c-60.96,2.54) -60.435,5.065 cw(c-60.96,2.54) -60.274,5.026 ; -71.743,-24.02 cw(c-71.946,-24.166) -71.723,-24.053 ccw(c-71.12,-23.75) -71.324,-24.393 cw(c-71.401,-24.631) -71.287,-24.409 ccw(c-70.7,-23.258) -70.7,-24.55 -58.34,-24.55 cw(c-58.34,-27.389) -57.101,-24.834 ccw(c-56.992,-24.609) -56.992,-24.859 -51.363,-24.859 cw(c-51.363,-28.222) -48,-28.222 v1(-48,-30.25) -48.649,-30.899 cw(c-50.445,-29.103) -48.862,-31.089 cw(c-49.017,-30.893) -49.016,-31.143 -53.249,-31.143 cw(c-53.249,-30.893) -53.383,-31.104 ccw(c-54.61,-33.02) -53.39,-31.1 ccw(c-54.61,-33.02) -53.709,-30.931 ccw(c-54.61,-33.02) -56.098,-31.299 ccw(c-54.61,-33.02) -56.331,-31.532 ccw(c-54.61,-33.02) -56.351,-31.556 cw(c-56.542,-31.394) -56.536,-31.644 -56.538,-31.644 ccw(c-56.491,-34.683) -57.755,-31.918 ccw(c-56.491,-34.683) -58.642,-32.535 -59.354,-33.246 -59.983,-33.876 cw(c-60.16,-33.7) -60.259,-33.929 ccw(c-60.96,-35.56) -60.285,-33.918 ccw(c-60.96,-35.56) -61.701,-33.947 ccw(c-60.96,-35.56) -62.132,-34.227 cw(c-62.296,-34.038) -62.295,-34.288 -70.962,-34.288 ccw(c-70.962,-35.508) -71.812,-34.634 cw(c-73.416,-33.02) -71.824,-34.645 cw(c-73.416,-33.02) -72.961,-35.249 ccw(c-72.91,-35.494) -73.16,-35.493 -73.16,-37.205 ccw(c-72.91,-37.204) -73.15,-37.274 cw(c-75.956,-38.1) -73.15,-38.926 ccw(c-72.91,-38.996) -73.16,-38.995 -73.16,-39.25 -73.16,-50.19 ccw(c-72.91,-50.189) -73.004,-50.421 cw(c-73.66,-52.07) -73.003,-53.719 ccw(c-72.91,-53.951) -73.16,-53.95 -73.16,-61.592 ccw(c-72.91,-61.591) -73.158,-61.624 cw(c-76.169,-62.043) -73.129,-62.043 -73.129,-65.356 ccw(c-70.589,-65.356) -72.385,-67.152 K44_S1.2@-66.511,-73.026 ; -60.273,5.026 ccw(c-59.873,6.472) -60.271,5.025 ; -60.269,5.025 ccw(c-60.137,5.507) -60.266,5.024 ccw(c-60.005,5.989) -60.264,5.023 ccw(c-59.873,6.472) -59.872,4.972 ; -59.871,4.972 -58.616,4.972 ccw(c-58.616,6.722) -57.002,6.045 ccw(c-58.385,6.626) -57,6.05 ccw(c-57.923,6.435) -56.999,6.052 ccw(c-57.46,6.244) -56.998,6.054 ; -56.997,6.057 ccw(c-57.922,6.437) -56.996,6.059 ; -56.996,6.06 cw(c-54.61,5.08) -56.817,6.415 cw(c-54.61,5.08) -54.782,7.653 cw(c-54.61,5.08) -53.619,7.461 ; -53.619,7.461 cw(c-54.61,5.08) -53.125,7.189 -49.901,7.189 ccw(c-49.901,7.439) -49.742,7.245 v1(-49.068,7.798)
  Bottom Layer w0.15: v1(-49.068,7.798) -48.864,8.002 cw(c-48.759,7.895) -48.798,8.04 -48.417,8.142 ccw(c-48.579,8.746) -48.392,8.149 -47.784,8.339 cw(c-47.739,8.196) -47.739,8.346 -45.928,8.346 cw(c-45.928,8.196) -45.801,8.276 -45.618,7.985 ccw(c-44.75,8.53) -44.601,7.516 ccw(c-44.75,8.53) -43.943,7.899 cw(c-43.825,7.805) -43.826,7.955 -36.133,7.955 ccw(c-36.133,8.105) -36.105,7.958 cw(c-35.56,5.08) -35.015,7.958 ccw(c-34.987,8.105) -34.987,7.955 -28.797,7.955 cw(c-28.798,7.805) -28.662,7.869 ccw(c-28.094,8.13) -27.472,8.192 cw(c-27.323,8.205) -27.324,8.355 -26.293,8.355 cw(c-26.293,7.587) v1(-25.75,8.13) ; v1(-26.755,15.335) -26.468,15.044 ccw(c-26.362,15.15) -26.41,15.008 ; -26.409,15.007 -26.215,14.942 -15.773,14.942 -15.77,14.943 -15.725,14.988 -15.654,15.062 cw(c-13.76,13.244) -12.614,15.606 -8,15.606 -7.033,15.807 ccw(c-7.064,15.954) v1@-6.958,15.848 ; v1@-6.957,15.848 v1(-6.925,15.862)
  Bottom Layer w0.25: v1(-48,-30.25) K44_D1.2@-48,-28.7
NetK44_K62_D2_1: K44_K62_D2.1 K44_K62_R1.2 | length 1.4
  Top Layer w0.15: v1(-6.245,22.412) -5.935,22.814 K44_K62_D2.1@-5.763,22.903
  Bottom Layer w0.15: v1(-6.245,22.412) -5.935,22.814 K44_K62_R1.2@-5.759,22.899
NetK50_D1_2: K50_D1.2 K50_K62_D2.2 K50_S1.2 | length 160.2
  Top Layer w0.15: v1(-44.459,11.481) -44.459,9.618 ccw(c-44.309,9.619) -44.366,9.48 cw(c-44.75,8.53) -43.819,8.102 cw(c-44.75,8.53) -44.086,7.749 ccw(c-43.988,7.636) -44.118,7.711 ccw(c-42.501,6.783) -44.277,7.349 ccw(c-44.134,7.304) -44.284,7.305 -44.284,1.813 ccw(c-43.516,1.813) v1(-44.059,1.27) ; -0.302,16.708 -0.287,16.022 ; -0.302,16.708 cw(c0.898,16.733) -0.302,16.711 cw(c1.473,16.745) -0.288,16.966 cw(c0.506,16.868) -0.288,16.968 cw(c0.109,16.919) -0.288,16.969 -0.201,17.649 cw(c0.195,17.599) -0.201,17.651 ; -0.287,16.02 ccw(c1.487,16.06) -0.263,15.764 ccw(c0.132,15.829) -0.262,15.762 -0.147,15.086 ccw(c0.247,15.153) -0.147,15.084 ccw(c0.641,15.22) -0.147,15.083 ccw(c1.602,15.384) -0.085,14.834 ccw(c0.676,15.08) -0.085,14.833 0.416,13.291 cw(c0.273,13.244) v1(0.379,13.138) ; -0.201,17.652 cw(c1.559,17.425) -0.149,17.906 ; -0.149,17.907 0.036,18.566 cw(c0.421,18.458) 0.037,18.568 ; 0.037,18.569 cw(c1.745,18.085) 0.124,18.809 cw(c0.855,18.484) 0.125,18.811 ccw(c-0.241,18.973) 0.128,18.817 0.409,19.482 0.691,20.148 ccw(c0.185,20.362) 0.693,20.153 0.724,20.226 ccw(c0.585,20.283) 0.735,20.283 K50_K62_D2.2@0.735,22.118
  Top Layer w0.2: K50_S1.2@-92.71,5.08 -90.297,2.667 ccw(c-88.501,4.463) -88.501,1.923 v1(-86.799,1.923)
  Top Layer w0.25: v1(-83.506,1.923) -83.53,0.028 ccw(c-81.35,0.001) -82.127,-2.036 -82.125,-2.036 ccw(c-82.038,-1.802) -82.052,-2.052 cw(c-82.086,-2.71) -81.62,-2.244 cw(c-81.885,-2.509) -81.51,-2.509 -81.51,-3.155 ; -81.51,-3.15 -81.51,-9.412 -81.51,-14.175 ccw(c-80.01,-16.51) -82.778,-16.71 ccw(c-82.279,-16.675) -82.778,-16.711 -82.733,-17.332 ccw(c-81.28,-19.05) -83.311,-20.018 ccw(c-81.28,-19.05) -82.041,-21.167 ccw(c-81.87,-20.697) -82.039,-21.168 -80.342,-21.776 ccw(c-77.47,-18.935) -77.47,-22.975 -76.835,-22.975 cw(c-76.835,-23.681) -76.177,-23.427 cw(c-76.41,-23.516) -76.16,-23.515 ccw(c-71.12,-23.51) -76.129,-24.066 ccw(c-71.12,-23.51) -75.896,-25.119 ccw(c-74.948,-24.802) -75.896,-25.12 ccw(c-75.422,-24.962) -75.895,-25.122 -75.762,-25.518 ccw(c-75.288,-25.358) -75.761,-25.519 ccw(c-74.814,-25.198) -75.761,-25.521 ccw(c-71.46,-24.066) -75.673,-25.759 ccw(c-71.46,-24.066) -74.098,-27.761 ccw(c-73.515,-26.948) -74.097,-27.761 ccw(c-73.805,-27.355) -74.096,-27.762 -73.965,-27.855 ccw(c-73.675,-27.448) -73.963,-27.857 -73.702,-28.043 cw(c-73.847,-28.247) -73.664,-28.077 -73.543,-28.207 ccw(c-73.36,-28.037) -73.537,-28.213 ; -73.537,-28.213 v1(-73,-28.75)
  Bottom Layer w0.15: v1(-44.459,11.481) cw(c-44.314,11.521) -44.41,11.637 cw(c-42.987,9.885) -42.987,12.142 -32.803,12.142 ccw(c-32.804,12.292) -32.657,12.263 cw(c-32.044,12.142) -31.435,12.285 ccw(c-31.29,12.32) -31.329,12.175 ccw(c-31.078,13.108) -31.078,12.142 -28.82,12.142 cw(c-28.821,11.992) -28.801,12.141 -28.781,12.138 ccw(c-28.593,13.551) -28.404,12.138 -28.385,12.141 cw(c-28.365,11.992) -28.366,12.142 -12.164,12.142 -1.878,12.142 -0.969,12.142 ccw(c-0.97,12.292) -0.911,12.154 -0.45,12.351 ccw(c-0.51,12.489) -0.42,12.369 ccw(c-1.878,14.277) -0.18,12.579 v1(0.379,13.138)
  Bottom Layer w0.2: v1(-86.799,1.923) v1(-83.506,1.923) -83.506,0.29 ccw(c-80.966,0.29) -80.966,-2.25 -78.017,-2.25 ; -78.016,-2.25 cw(c-78.018,-2.45) -77.902,-2.287 -77.852,-2.322 ccw(c-76.2,0) -75.52,-2.768 ; -75.519,-2.767 cw(c-75.472,-2.962) -75.469,-2.762 -74.761,-2.772 ccw(c-74.754,-2.322) -74.753,-2.772 -58.979,-2.842 ; -58.978,-2.842 cw(c-58.981,-3.042) -58.88,-2.869 -58.836,-2.895 ccw(c-57.15,0) -55.698,-3.019 ; -55.696,-3.018 ccw(c-57.15,0) -55.694,-3.017 cw(c-55.608,-3.198) -55.612,-2.998 -51.568,-2.92 -49.3,-2.92 ccw(c-49.3,-0.38) -48.732,-2.855 -48.685,-2.844 ccw(c-48.891,-1.942) -48.628,-2.829 -48.581,-2.815 ccw(c-49.3,-0.38) -47.504,-2.176 v1(-44.059,1.27)
  Bottom Layer w0.25: v1(-73,-28.75) -72.05,-28.75 K50_D1.2@-72,-28.7
NetK50_K62_D2_1: K50_K62_D2.1 K50_K62_R1.2 | length 1.9
  Top Layer w0.15: K50_K62_D2.1@1.338,22.915 1.338,23.115 1.541,23.318 v1(1.541,23.774)
  Bottom Layer w0.15: K50_K62_R1.2@1.338,22.915 1.338,23.115 1.541,23.318 v1(1.541,23.774)
NetK51_D1_2: K51_D1.2 K51_K62_D2.2 K51_S1.2 | length 355.1
  Top Layer w0.15: -87.287,-14.421 ccw(c-87.162,-14.041) -87.286,-14.421 ccw(c-85.725,-9.75) -86.05,-14.664 -86.05,-28.009 ccw(c-85.25,-28.65) -85.842,-29.486 -85.842,-30.52 ccw(c-85.442,-31) -85.042,-30.52 -85.042,-29.345 ; -85.44,-6.036 cw(c-85.41,-5.637) -85.442,-6.036 ; -81.452,6.577 -81.289,6.575 ; -80.51,6.575 -81.288,6.58 -81.452,6.581 -82.855,6.591 ; -73.612,7.605 ccw(c-73.66,5.08) -75.65,6.634 cw(c-75.768,6.727) -75.767,6.577 -78.616,6.575 -81.452,6.575 -82.855,6.591 ; -73.611,7.605 -70.136,7.605 ccw(c-70.137,7.755) -70.061,7.625 cw(c-68.122,4.368) -69.297,7.972 cw(c-68.122,4.368) -68.122,8.158 -63.909,8.158 ccw(c-63.91,8.308) -63.842,8.175 cw(c-60.96,2.54) -62.332,8.719 cw(c-62.243,8.329) -62.33,8.719 ; -62.328,8.719 cw(c-60.96,2.54) -61.722,8.823 ; -61.72,8.823 -61.722,8.823 ; v1(-48.553,13.952) ccw(c-48.553,11.562) -50.244,13.252 -51.252,12.243 cw(c-51.358,12.35) -51.333,12.202 ccw(c-51.175,11.19) -52.181,11.383 cw(c-52.329,11.412) -52.193,11.347 -52.234,11.262 -53.238,11.262 cw(c-53.237,11.412) -53.268,11.265 ccw(c-54.61,5.08) -55.245,11.377 ccw(c-54.61,5.08) -56.262,11.19 ccw(c-55.937,9.983) -56.265,11.189 ccw(c-54.61,5.08) -59.635,8.927 cw(c-59.754,9.019) -59.754,8.869 -60.758,8.866 cw(c-60.759,9.291) -60.77,8.866 ccw(c-60.96,2.54) -60.96,8.869 ccw(c-60.96,2.54) -61.722,8.823 ; v1(-7.642,16.319) -7.45,16.51 ccw(c-9.246,18.306) -6.706,18.306 -6.706,19.113 ccw(c-6.856,19.116) -6.706,19.116 -6.706,19.156 -6.808,19.336 cw(c-6.46,19.533) -6.809,19.337 cw(c-5.829,19.89) -6.949,19.995 cw(c-6.152,19.921) -6.949,19.997 cw(c-6.55,19.96) -6.948,19.999 -6.9,20.496 cw(c-6.502,20.458) -6.9,20.498 cw(c-6.104,20.419) -6.9,20.5 cw(c-5.78,20.388) -6.897,20.524 -6.84,20.996 ccw(c-7.162,21.035) -6.872,21.181 -7.254,21.944 cw(c-7.12,22.011) -7.27,22.011 -7.27,23.496 cw(c-6.945,23.499) -7.203,23.698 -6.897,24.094 cw(c-6.64,23.895) -6.468,24.171 ccw(c-6.39,24.299) -6.358,24.152 ccw(c-6.897,26.608) -5.578,24.468 ccw(c-5.657,24.595) -5.51,24.565 cw(c-4.799,24.426) -4.799,25.151 -4.327,25.151 ccw(c-4.327,26.041) -3.697,25.411 -3.559,25.55 ccw(c-5.071,27.064) -3.151,26.118 ccw(c-5.071,27.064) -2.951,26.777 ccw(c-3.099,26.796) -2.95,26.788 -2.931,27.139 ccw(c-3.081,27.146) -2.931,27.146 -2.931,27.859 ccw(c-3.081,27.858) -2.95,27.931 ccw(c-4.044,27.323) -2.992,28.001 K51_K62_D2.2@-3.159,28.208 ; -87.29,-14.42 cw(c-85.725,-9.75) -86.05,-4.836 -86.05,3.567 ; -87.29,-14.42 ccw(c-87.162,-14.041) -87.288,-14.421 ; -87.29,-14.42 ccw(c-87.162,-14.041) -87.288,-14.421 ; -87.29,-14.42 cw(c-85.725,-9.75) -86.185,-4.847 ccw(c-86.2,-4.697) -86.05,-4.698 -86.05,3.567 ; -87.288,-14.421 ccw(c-85.725,-9.75) -87.276,-14.424 ccw(c-85.725,-9.75) -86.186,-14.653 cw(c-86.2,-14.803) -86.05,-14.802 -86.05,-27.959 cw(c-86.2,-27.959) -86.078,-28.046 ccw(c-85.25,-28.65) -85.897,-29.445 cw(c-85.992,-29.561) -85.842,-29.56 -85.842,-30.455 cw(c-85.992,-30.454) -85.885,-30.559 ccw(c-85.442,-31) -85,-30.559 cw(c-84.892,-30.454) -85.042,-30.455 -85.042,-29.345 ; -86.05,3.567 cw(c-83.027,3.567) -83.027,6.591 ; -86.05,3.567 cw(c-83.027,3.567) -83.027,6.591 ; -85.442,-6.036 ccw(c-85.725,-9.75) -85.442,-13.464 cw(c-85.725,-9.75) -85.566,-6.028 cw(c-85.573,-6.178) -85.564,-6.029 -85.442,-6.036 ; -85.442,-6.036 -85.439,-6.036 ; -85.439,-6.036 ccw(c-85.41,-5.637) -85.434,-6.036 ; -85.439,-6.036 -85.434,-6.036 ; -85.437,-13.464 cw(c-85.4,-14.013) -84.85,-14.009 ccw(c-85.4,-14.013) -85.437,-13.464 ; -85.437,-13.464 ccw(c-85.411,-13.863) -85.44,-13.464 cw(c-85.411,-13.863) -85.437,-13.464 ; -85.434,-6.036 ccw(c-85.4,-5.487) -84.85,-5.491 ; -85.434,-6.036 ccw(c-85.4,-5.487) -84.85,-5.491 ; -85.042,-29.345 ccw(c-85.592,-29.345) -85.052,-29.243 ccw(c-85.25,-28.65) -84.85,-28.17 -84.85,-14.012 ; -85.042,-29.345 ccw(c-85.592,-29.345) -85.042,-29.343 -85.042,-29.338 cw(c-84.892,-29.338) -84.962,-29.205 ccw(c-85.25,-28.65) -84.807,-28.209 cw(c-84.7,-28.104) -84.85,-28.105 -84.85,-14.012 ; -84.85,-14.012 ccw(c-85.4,-14.013) -84.85,-14.01 cw(c-85.4,-14.013) -84.85,-14.012 ; -84.85,-5.491 ccw(c-85.25,-5.488) -84.85,-5.488 ; -84.85,-5.491 ccw(c-85.25,-5.488) -84.85,-5.488 ; -84.85,-5.488 -84.85,3.567 ; -84.85,-5.488 -84.85,3.567 ; -84.85,3.567 cw(c-83.027,3.567) -83.029,5.391 -81.624,5.375 ccw(c-81.62,5.775) -81.62,5.375 ; -84.85,3.567 cw(c-83.027,3.567) -83.276,5.374 cw(c-83.257,5.225) -83.257,5.375 -81.62,5.375 ; -83.027,6.591 -82.859,6.591 ; -83.027,6.591 -82.859,6.591 ; -82.859,6.591 cw(c-82.859,6.191) -82.855,6.591 ; -82.859,6.591 cw(c-82.859,6.191) -82.855,6.591 ; -81.62,5.375 -79.712,5.375 -81.62,5.375
  Top Layer w0.25: K51_S1.2@-97.466,-13.97 -97.466,-31.524 cw(c-100.006,-31.524) -98.21,-33.32 -98.971,-34.082 cw(c-100.389,-33.014) -99.31,-34.423 ccw(c-99.157,-34.621) -99.332,-34.443 -99.983,-35.094 ccw(c-98.187,-36.89) -100.727,-36.89 -100.727,-37.026 ccw(c-100.477,-37.025) -100.707,-37.124 cw(c-102.929,-38.094) -100.727,-39.11 cw(c-102.929,-38.094) -101.418,-39.991 ccw(c-101.261,-40.186) -101.511,-40.185 -101.511,-45.402 -101.504,-45.478 -101.503,-45.481 -100.501,-46.482 ccw(c-99.414,-45.391) -100.141,-46.749 ccw(c-100.095,-45.71) -100.095,-46.75 -92.802,-46.75 -92.621,-46.75 -92.539,-46.501 ; -92.538,-46.5 cw(c-85.725,-48.75) -88.78,-42.258 cw(c-85.725,-48.75) -85.424,-41.581 ccw(c-85.424,-40.942) -84.785,-40.942 -84.785,-40.58 ccw(c-85.035,-40.58) -84.826,-40.442 cw(c-81.28,-38.1) -85.371,-39.251 cw(c-81.28,-38.1) -84.785,-35.696 -84.785,-32.599 -84.767,-32.599 -84.767,-29.5 cw(c-84.017,-29.5) -84.017,-28.75 v1(-79,-28.75)
  Bottom Layer w0.15: v1(-48.553,13.952) -48.225,14.281 cw(c-46.429,12.484) -46.429,15.024 -34.839,15.024 cw(c-34.839,14.874) -34.774,15.01 -34.375,14.819 ; -34.375,14.819 ccw(c-33.931,15.742) -33.041,15.233 cw(c-32.912,15.157) -32.912,15.307 -29.833,15.307 -28.289,15.333 ccw(c-28.295,15.883) -28.156,15.351 -28.07,15.373 ccw(c-28.171,15.76) -28.069,15.373 ccw(c-28.31,16.292) -27.863,15.454 -27.052,15.886 cw(c-26.755,15.335) -26.951,15.929 cw(c-26.755,15.335) -26.24,15.69 -26.03,15.386 ; -26.029,15.386 ccw(c-25.924,15.492) -25.924,15.342 -15.939,15.342 cw(c-13.76,13.244) -12.553,16.018 ccw(c-12.494,16.156) -12.495,16.006 -8.057,16.006 ccw(c-8.057,16.156) -8.026,16.009 -7.976,16.019 ccw(c-8.006,16.166) -7.901,16.06 v1(-7.642,16.319)
  Bottom Layer w0.25: v1(-79,-28.75) -78.05,-28.75 K51_D1.2@-78,-28.7